# Altium PCB PCB3.PcbDoc (part 2 of 2)
Units mil, origin at the board's own origin, x right, y up, seen from the top; angles counter-clockwise.
Board outline 2814.98 x 1889.76 mil, 4 copper layers (Top Layer, GND, VCC, Bottom Layer), stack 23.756 mil thick; 125 components, 87 nets, 460 pads, 520 vias.
Unrouted connection lines stored in the file: 133.
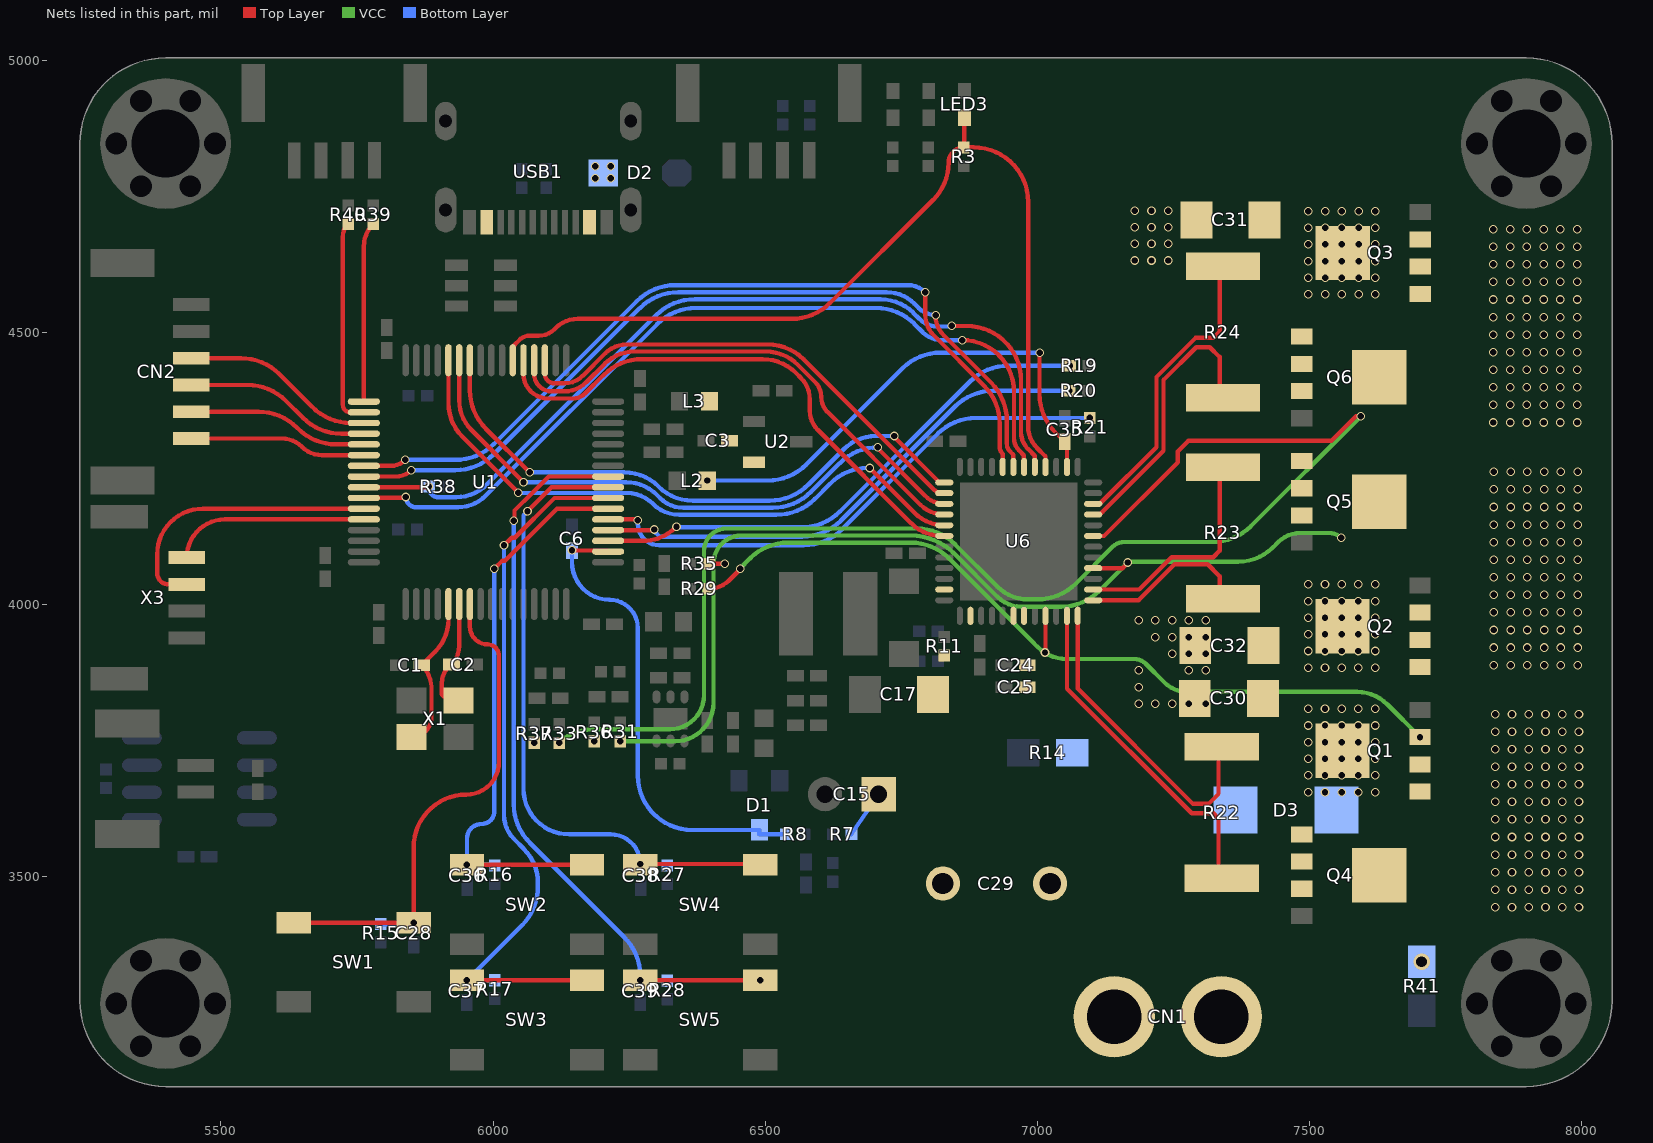
[diagram p3: the nets of this part, all layers, seen from the top]

## Via types
v1: diameter 15.75, hole 11.81, Top Layer to Bottom Layer, tented both sides, 515 vias
v2: diameter 30, hole 20, Top Layer to Bottom Layer, tented both sides, 5 vias

## Nets (pads, with @x,y where several pads share a name; then routed paths per layer and width w, separated by ;. In a path a pad name is that pad's centre, name@x,y a point inside that pad or via, vN(x,y) a via of type N, cw(c..) or ccw(c..) an arc to the next point about the centre after c; other vN are vias at no path point) (continued)
nFAULT: LED3.1 R3.1 U1.38 U6.28 | length 1747.3
  Top Layer w8: U1.38@6036.21,4448.95 6036.21,4473.6 6040.99,4478.38 6040.99,4478.74 6048.62,4486.37 cw(c6067.04,4467.95) 6067.04,4494 6084.02,4494 ccw(c6084.02,4534.68) 6112.78,4505.91 6115.14,4508.27 cw(c6155.53,4467.88) 6155.53,4525 6548.58,4525 ccw(c6548.58,4625) 6619.29,4554.29 6808.69,4743.69 ccw(c6740.33,4812.04) 6837,4812.04 cw(c6865,4812.04) R3.1@6865,4840.04 ; LED3.1@6866,4894.47 6866,4841.04 R3.1@6865,4840.04 ; U6.28@7015.01,4253.07 7015.01,4272.38 6999,4288.38 cw(c7037.64,4327.02) 6983,4327.02 6983,4740.04 ccw(c6883,4740.04) 6883,4840.04 R3.1@6865,4840.04
NRST: C28.2 R15.1 SW1.2 SW1.3 U1.7 | length 990.5
  Top Layer w8: SW1.3@5633.63,3415.83 v1(5854.1,3415.83) 5854.1,3554.1 cw(c5951,3554.1) 5951,3651 ccw(c5951,3711) 6011,3711 6011,3906 ccw(c5990.01,3906) 5990.01,3926.99 cw(c5990.01,3959.53) 5957.47,3959.53 U1.7@5957.47,4001.05
  Bottom Layer w8: R15.1@5794,3413.04 5854.1,3413.04 C28.2@5854.1,3417.61
PA4: C6.1 D1.3 R8.1 U1.18 | length 886.9
  Top Layer w8: v1(6145,4099.54) 6209.39,4099.54 U1.18@6211.41,4097.52
  Bottom Layer w8: v1(6145,4099.54) 6145,4078 ccw(c6214.07,4078) 6214.07,4008.93 cw(c6214.07,3957) 6266,3957 6266,3686.04 ccw(c6366,3686.04) 6366,3586.04 D1.3@6489.32,3586.04 6489.32,3578 R8.1@6537.92,3578
PB0: C38.2 R27.1 SW4.2 SW4.3 U1.24 | length 1246.4
  Top Layer w8: v1(6063.36,4171.64) 6107.35,4215.62 U1.24@6211.41,4215.62 ; v1(6270.57,3523.44) 6489.39,3523.44 SW4.2@6491,3521.83
  Bottom Layer w8: v1(6063.36,4171.64) 6055.9,4164.18 6055.9,3661.87 ccw(c6139.77,3661.87) 6139.77,3578 6216.01,3578 cw(c6216.01,3523.44) v1(6270.57,3523.44) 6312.6,3523.44 R27.1@6320,3516.04
PB1: C39.2 R28.1 SW5.2 SW5.3 U1.25 | length 1425.6
  Top Layer w8: v1(6038.03,4154) 6039.51,4155.48 6039.51,4173.06 6055.96,4189.51 6056.51,4189.51 6102.31,4235.31 U1.25@6211.41,4235.31 ; v1(6270.53,3309.83) v1(6491,3309.83)
  Bottom Layer w8: v1(6038.03,4154) 6038.03,3633.4 ccw(c6138.03,3633.4) 6067.32,3562.68 6241.24,3388.76 cw(c6170.53,3318.05) 6270.53,3318.05 v1(6270.53,3309.83) 6318.21,3309.83 R28.1@6324,3304.04
PC4: C36.2 R16.1 SW2.2 SW2.3 U1.22 | length 1090.7
  Top Layer w8: v1(5952.08,3521.83) SW2.2@6172.55,3521.83 ; v1(6002.28,4066) 6016.66,4080.38 6021.66,4080.38 6117.53,4176.26 U1.22@6211.41,4176.26
  Bottom Layer w8: v1(5952.08,3521.83) 5999.21,3521.83 R16.1@6003,3518.04 ; C36.2@5952.08,3531.68 5952.08,3570.08 cw(c5979,3570.08) 5979,3597 ccw(c5979,3620.28) 6002.28,3620.28 v1(6002.28,4066)
PC5: C37.2 R17.1 SW3.2 SW3.3 U1.23 | length 1370.6
  Top Layer w8: v1(5952.08,3309.83) SW3.2@6172.55,3309.83 ; v1(6020.15,4109) 6020.34,4109 6034.3,4122.96 6039.96,4122.96 6112.94,4195.94 U1.23@6211.41,4195.94
  Bottom Layer w8: R17.1@6004,3303.04 5997.21,3309.83 v1(5952.08,3309.83) 6053.14,3410.89 ccw(c5982.43,3481.61) 6082.43,3481.61 6082.43,3489 ccw(c5994.14,3489) 6056.57,3551.43 6038.43,3569.57 cw(c6082.54,3613.69) 6020.15,3613.69 v1(6020.15,4109)
PWM_AH: U1.42 U6.37 | length 1101.7
  Top Layer w8: U1.42@5957.47,4448.95 5957.47,4393.95 ccw(c6057.47,4393.95) 5986.76,4323.24 6066.89,4243.11 v1(6067.34,4243.56) ; v1(6736.78,4309.78) 6736,4309 6820.46,4224.54 U6.37@6829,4224.54
  Bottom Layer w8: v1(6067.34,4243.56) 6067.34,4243 6241.23,4243 cw(c6241.23,4154.23) 6304,4217 ccw(c6366.77,4279.77) 6366.77,4191 6508.28,4191 ccw(c6508.28,4291) 6578.99,4220.29 6643.34,4284.65 cw(c6704.02,4223.97) 6704.02,4309.78 v1(6736.78,4309.78)
PWM_AL: U1.35 U6.38 | length 902.9
  Top Layer w8: U1.35@6095.27,4448.95 6095.27,4423.92 ccw(c6112.67,4423.92) 6112.67,4406.53 6131.53,4406.53 ccw(c6131.53,4453.44) 6164.7,4420.27 6205.83,4461.4 cw(c6245.91,4421.33) 6245.91,4478 6504.5,4478 cw(c6504.5,4384.39) 6570.7,4450.58 6811.25,4210.03 6811.78,4210.03 6816.96,4204.85 U6.38@6829,4204.85
PWM_BH: U1.43 U6.39 | length 1135.6
  Top Layer w8: U1.43@5937.79,4448.95 5937.79,4375.59 ccw(c6015.97,4375.59) 5960.69,4320.31 v1(6056,4225) ; v1(6707,4289) 6707,4286.72 6794.1,4199.62 ccw(c6829,4234.52) U6.39@6829,4185.17
  Bottom Layer w8: v1(6056,4225) 6244.38,4225 cw(c6244.38,4144.77) 6301.12,4201.5 6306.92,4195.7 ccw(c6349.64,4238.42) 6349.64,4178 6513.66,4178 ccw(c6513.66,4278) 6584.37,4207.29 6637.15,4260.07 cw(c6707,4190.21) v1(6707,4289)
PWM_BL: U1.36 U6.40 | length 954.5
  Top Layer w8: U1.36@6075.58,4448.94 6075.58,4423.93 ccw(c6107.71,4423.93) 6107.71,4391.8 6131.17,4391.8 ccw(c6131.17,4448.42) 6171.2,4408.39 6205.07,4442.26 cw(c6259.98,4387.35) 6259.98,4465 6500.67,4465 cw(c6500.67,4380.64) 6560.32,4440.29 6591.54,4409.07 cw(c6564.08,4381.61) 6602.92,4381.61 ccw(c6641.75,4381.61) 6614.29,4354.16 6784.56,4183.88 ccw(c6829,4228.32) U6.40@6829,4165.48
PWM_CH: U1.44 U6.41 | length 1153.6
  Top Layer w8: U1.44@5918.1,4448.95 5918.1,4370.75 ccw(c6007.06,4370.75) 5944.16,4307.84 v1(6046.66,4205.34) ; v1(6692,4251) 6774.72,4168.28 ccw(c6829,4222.56) U6.41@6829,4145.8
  Bottom Layer w8: v1(6046.66,4205.34) 6047,4205 6245.72,4205 cw(c6245.72,4136.72) 6294,4185 ccw(c6342.28,4233.28) 6342.28,4165 6520.58,4165 ccw(c6520.58,4265) 6591.29,4194.29 6619.64,4222.64 cw(c6688.1,4154.19) 6688.1,4251 v1(6692,4251)
PWM_CL: U1.37 U6.42 | length 1008.8
  Top Layer w8: U1.37@6055.9,4448.95 6055.9,4423.92 ccw(c6101.02,4423.92) 6101.02,4378.8 6146.71,4378.8 ccw(c6146.71,4410.9) 6169.41,4388.2 6202.91,4421.71 cw(c6273.62,4351) 6273.62,4451 6495.33,4451 cw(c6495.33,4364.33) 6556.62,4425.62 6565.49,4416.74 cw(c6525.64,4376.88) 6582,4376.88 6582,4356.3 ccw(c6631.69,4356.3) 6596.55,4321.17 6768.42,4149.3 ccw(c6824.41,4205.29) 6824.41,4126.11 U6.42@6829,4126.11
SHA: Q1.1 Q1.2 Q1.3 Q4.5 R29.2 U6.9 | length 1537.4
  Top Layer w8: R29.2@6396.25,4029.33 ccw(c6396.25,4082.63) 6433.94,4044.94 6454,4065 v1(6454,4066) ; v1(7014,3912) 7015.01,3913.01 U6.9@7015.01,3979.47
  VCC w8: v1(6454,4066) 6454,4067 6471.61,4084.61 cw(c6542.32,4013.9) 6542.32,4113.9 6767.43,4113.9 cw(c6767.43,4013.9) 6838.14,4084.61 6871.68,4051.07 ; 6871.56,4051.18 6988.64,3934.11 ; 6988.75,3934 7000.38,3922.37 ccw(c7054.38,3976.36) 7054.38,3900 7178.21,3900 cw(c7178.21,3870.25) 7199.25,3891.29 7233.63,3856.9 ccw(c7275.25,3898.51) 7275.25,3839.66 7587.75,3839.66 cw(c7587.75,3762.11) 7642.59,3816.95 v1(7702.94,3756.6)
  other v1: 7841.25,3444 7872,3444 7902.75,3444 7933.5,3444 7964.25,3444 7995,3444 7841.25,3476.27 7872,3476.27 7902.75,3476.27 7933.5,3476.27 7964.25,3476.27 7995,3476.27 7841.25,3508.55 7872,3508.55 7902.75,3508.55 7933.5,3508.55 7964.25,3508.55 7995,3508.55 7841.25,3540.82 7872,3540.82 7902.75,3540.82 7933.5,3540.82 7964.25,3540.82 7995,3540.82 7841.25,3573.09 7872,3573.09 7902.75,3573.09 7933.5,3573.09 7964.25,3573.09 7995,3573.09 7841.25,3605.36 7872,3605.36 7902.75,3605.36 7933.5,3605.36 7964.25,3605.36 7995,3605.36 7841.25,3637.64 7872,3637.64 7902.75,3637.64 7933.5,3637.64 7964.25,3637.64 7995,3637.64 7841.25,3669.91 7872,3669.91 7902.75,3669.91 7933.5,3669.91 7964.25,3669.91 7995,3669.91 7841.25,3702.18 7872,3702.18 7902.75,3702.18 7933.5,3702.18 7964.25,3702.18 7995,3702.18 7841.25,3734.45 7872,3734.45 7902.75,3734.45 7933.5,3734.45 7964.25,3734.45 7995,3734.45 7841.25,3766.73 7872,3766.73 7902.75,3766.73 7933.5,3766.73 7964.25,3766.73 7995,3766.73 7841.25,3799 7872,3799 7902.75,3799 7933.5,3799 7964.25,3799 7995,3799
SHB: Q2.1 Q2.2 Q2.3 Q5.5 R31.2 U6.16 | length 1813.6
  Top Layer w8: U6.16@7102.6,4067.06 7157.06,4067.06 7166.7,4076.7 v1(7165.96,4077.44)
  VCC w8: v1(6233.53,3749.05) 6334.54,3749.05 ccw(c6334.54,3819.51) 6405,3819.51 6405,4075.33 cw(c6456.57,4075.33) 6456.57,4126.9 6767.43,4126.9 cw(c6767.43,4013.9) 6847.37,4093.76 6848.23,4092.91 6926.86,4014.27 ccw(c6970.49,4057.91) 6970.49,3996.2 7043.29,3996.2 ccw(c7043.29,4096.2) 7114.01,4025.49 7167.22,4078.7 7368.85,4078.7 ccw(c7368.85,4169.13) 7432.8,4105.19 7442.14,4114.53 cw(c7483.53,4073.14) 7483.53,4131.67 7535.91,4131.67 cw(c7535.91,4100.43) v1(7558,4122.52)
  other v1: 7838.75,3888.91 7869.5,3888.91 7900.25,3888.91 7931,3888.91 7961.75,3888.91 7992.5,3888.91 7838.75,3921.18 7869.5,3921.18 7900.25,3921.18 7931,3921.18 7961.75,3921.18 7992.5,3921.18 7838.75,3953.45 7869.5,3953.45 7900.25,3953.45 7931,3953.45 7961.75,3953.45 7992.5,3953.45 7838.75,3985.73 7869.5,3985.73 7900.25,3985.73 7931,3985.73 7961.75,3985.73 7992.5,3985.73 7838.75,4018 7869.5,4018 7900.25,4018 7931,4018 7961.75,4018 7992.5,4018 7838.75,4050.27 7869.5,4050.27 7900.25,4050.27 7931,4050.27 7961.75,4050.27 7992.5,4050.27 7838.75,4082.55 7869.5,4082.55 7900.25,4082.55 7931,4082.55 7961.75,4082.55 7992.5,4082.55 7838.75,4114.82 7869.5,4114.82 7900.25,4114.82 7931,4114.82 7961.75,4114.82 7992.5,4114.82 7838.75,4147.09 7869.5,4147.09 7900.25,4147.09 7931,4147.09 7961.75,4147.09 7992.5,4147.09 7838.75,4179.36 7869.5,4179.36 7900.25,4179.36 7931,4179.36 7961.75,4179.36 7992.5,4179.36 7838.75,4211.64 7869.5,4211.64 7900.25,4211.64 7931,4211.64 7961.75,4211.64 7992.5,4211.64 7838.75,4243.91 7869.5,4243.91 7900.25,4243.91 7931,4243.91 7961.75,4243.91 7992.5,4243.91
SHC: Q3.1 Q3.2 Q3.3 Q6.5 R33.2 U6.19 | length 2572.8
  Top Layer w8: U6.19@7102.6,4126.11 7122.52,4126.11 7257.77,4261.35 7257.77,4281.35 7277.42,4301 7540.27,4301 7585.27,4346 v1(7594,4346)
  VCC w8: v1(6122,3746.12) cw(c6182.07,3686.04) 6182.07,3771 6325.06,3771 ccw(c6325.06,3833.5) 6387.56,3833.5 6387.56,4098.6 cw(c6428.86,4098.6) 6428.86,4139.9 6778.2,4139.9 cw(c6778.2,4039.9) 6848.91,4110.61 6926.41,4033.11 ccw(c6983.1,4089.8) 6983.1,4009.63 7000.21,4009.63 ccw(c7000.21,4109.63) 7070.92,4038.92 7138.16,4106.16 cw(c7159.5,4084.82) 7159.5,4115 7321.58,4115 ccw(c7321.58,4215) 7392.29,4144.29 v1(7594,4346)
  other v1: 7837.75,4334.64 7868.5,4334.64 7899.25,4334.64 7930,4334.64 7960.75,4334.64 7991.5,4334.64 7837.75,4366.91 7868.5,4366.91 7899.25,4366.91 7930,4366.91 7960.75,4366.91 7991.5,4366.91 7837.75,4399.18 7868.5,4399.18 7899.25,4399.18 7930,4399.18 7960.75,4399.18 7991.5,4399.18 7837.75,4431.45 7868.5,4431.45 7899.25,4431.45 7930,4431.45 7960.75,4431.45 7991.5,4431.45 7837.75,4463.73 7868.5,4463.73 7899.25,4463.73 7930,4463.73 7960.75,4463.73 7991.5,4463.73 7837.75,4496 7868.5,4496 7899.25,4496 7930,4496 7960.75,4496 7991.5,4496 7837.75,4528.27 7868.5,4528.27 7899.25,4528.27 7930,4528.27 7960.75,4528.27 7991.5,4528.27 7837.75,4560.55 7868.5,4560.55 7899.25,4560.55 7930,4560.55 7960.75,4560.55 7991.5,4560.55 7837.75,4592.82 7868.5,4592.82 7899.25,4592.82 7930,4592.82 7960.75,4592.82 7991.5,4592.82 7837.75,4625.09 7868.5,4625.09 7899.25,4625.09 7930,4625.09 7960.75,4625.09 7991.5,4625.09 7837.75,4657.36 7868.5,4657.36 7899.25,4657.36 7930,4657.36 7960.75,4657.36 7991.5,4657.36 7837.75,4689.64 7868.5,4689.64 7899.25,4689.64 7930,4689.64 7960.75,4689.64 7991.5,4689.64
SNA: C29.2 C30.1 C31.1 C32.1 CN1.2 D3.2 R14.1 R22.1 R23.1 R24.1 R35.1 R36.1 R37.1 R41.1 U6.2 U6.12 U6.13 U6.22 | length 1472.2
  Top Layer w8: R35.1@6396.25,4075.33 6425.67,4075.33 v1(6426,4075) ; U6.12@7074.07,3979.47 7074.07,3845.93 7286.03,3633.97 7314.45,3633.97 7332.8,3652.32 R22.1@7332.8,3738.65 ; U6.13@7102.6,4008 7186,4008 7252,4074 7313,4074 7334.8,4052.2 R23.1@7334.8,4010.93 ; U6.22@7102.6,4185.17 7114.66,4185.17 7218.77,4289.27 7218.77,4418.21 7290.55,4490 7323,4490 7334.8,4501.8 R24.1@7334.8,4621.37
  other v1: 6076.09,3746.16 6186.16,3748.96 7186,3818 7216.75,3818 7247.5,3818 7278.25,3818 7309,3818 7186,3848.6 7186,3879.2 7278.25,3879.2 7309,3879.2 7247.5,3909.8 7278.25,3909.8 7309,3909.8 7216.75,3940.4 7247.5,3940.4 7278.25,3940.4 7309,3940.4 7186,3971 7216.75,3971 7247.5,3971 7278.25,3971 7309,3971 7179,4632.2 7209.75,4632.2 7240.5,4632.2 7179,4662.8 7209.75,4662.8 7240.5,4662.8 7179,4693.4 7209.75,4693.4 7240.5,4693.4 7179,4724 7209.75,4724 7240.5,4724
  other v2: 7706,3344
SOA: R21.1 U1.21 | length 1002.6
  Top Layer w8: U1.21@6211.41,4156.56 6264.44,4156.56 v1(6266,4155)
  Bottom Layer w8: v1(6266,4155) 6266,4148.59 ccw(c6305.59,4148.59) 6305.59,4109 6570.63,4109 ccw(c6570.63,4209) 6641.34,4138.29 6816.76,4313.71 cw(c6887.47,4243) 6887.47,4343 v1(7096,4343)
SOB: R20.1 U1.20 | length 957.7
  Top Layer w8: U1.20@6211.41,4136.88 6294.88,4136.88 v1(6296,4138)
  Bottom Layer w8: v1(6296,4138) 6296,4134.63 6305.63,4125 6568.24,4125 ccw(c6568.24,4225) 6638.95,4154.29 6848.18,4363.52 cw(c6918.89,4292.81) 6918.89,4392.81 v1(7058.92,4392.81)
SOC: R19.1 U1.19 | length 970.1
  Top Layer w8: U1.19@6211.41,4117.19 6275.01,4117.19 ccw(c6275.01,4204.87) 6297.84,4120.22 ccw(c6296,4138) 6304.65,4122.36 ccw(c6275.01,4204.87) v1(6337,4142.87)
  Bottom Layer w8: v1(6337,4142.87) 6337.87,4142 6566.86,4142 ccw(c6566.86,4242) 6637.57,4171.29 6875.8,4409.52 cw(c6946.51,4338.81) 6946.51,4438.81 v1(7059.92,4438.81)
SPA: Q4.1 Q4.2 Q4.3 R22.2 U6.11 | length 621.1
  Top Layer w8: U6.11@7054.38,3979.47 7054.38,3845.62 7283.43,3616.57 7323.55,3616.57 7332.8,3607.33 R22.2@7332.8,3497.21
SPB: Q5.1 Q5.2 Q5.3 R23.2 U6.14 | length 415.2
  Top Layer w8: U6.14@7102.6,4027.69 7187.3,4027.69 7246.62,4087 7323,4087 7334.8,4098.8 R23.2@7334.8,4252.37
SPC: Q6.1 Q6.2 Q6.3 R24.2 U6.21 | length 518.4
  Top Layer w8: U6.21@7102.6,4165.48 7114.64,4165.48 7119.82,4170.66 ; 7119.83,4170.66 7231.77,4282.59 7231.77,4292.12 7231.77,4412.83 7291.94,4473 7316.87,4473 7334.8,4455.07 R24.2@7334.8,4379.93
SPI1_CS: U1.55 U6.32 | length 1534.6
  Top Layer w8: U1.55@5762.59,4254.99 5812.43,4254.99 ccw(c5812.43,4292.57) v1(5839,4266) ; v1(6794,4574) 6794,4533 ccw(c6848.71,4533) 6810.02,4494.31 6901.71,4402.63 cw(c6831,4331.92) 6931,4331.92 6931,4289.37 ccw(c6948.99,4289.37) 6936.27,4276.65 U6.32@6936.27,4253.07
  Bottom Layer w8: v1(5839,4266) 5931.19,4266 ccw(c5931.19,4366) 6001.9,4295.29 6264.33,4557.71 cw(c6335.04,4487) 6335.04,4587 6762.62,4587 cw(c6762.62,4542.62) v1(6794,4574)
SPI1_MISO: R38.1 U1.57 U6.29 | length 1601.1
  Top Layer w8: U1.57@5762.59,4215.62 v1@5880.62,4215.62 ; v1(6842.96,4511.96) 6870,4511.96 cw(c6870,4411.96) 6970,4411.96 6970,4316.91 ccw(c7013.24,4316.91) 6982.66,4286.34 6995.33,4273.67 U6.29@6995.33,4253.07
  Bottom Layer w8: v1(5882,4217) 5882,4214.61 ccw(c5899.24,4214.61) 5899.24,4197.37 5932.26,4197.37 ccw(c5932.26,4277.09) 5988.62,4220.72 6299.62,4531.71 cw(c6370.33,4461) 6370.33,4561 6711.75,4561 cw(c6711.75,4475.64) 6772.11,4536 6783.1,4525 ccw(c6816.91,4558.81) 6816.91,4511 6842,4511 v1(6842.96,4511.96)
SPI1_MOSI: U1.58 U6.30 | length 1566.8
  Top Layer w8: U1.58@5762.59,4195.94 5763.32,4196.66 5838.66,4196.66 5839.88,4197.88 v1(5840,4197.75) ; v1(6862,4486) cw(c6862,4391) 6957,4391 6957,4305.46 ccw(c6987.83,4305.46) 6966.03,4283.66 6975.06,4274.63 6975.06,4253.65 U6.30@6975.64,4253.07
  Bottom Layer w8: v1(5840,4197.75) ccw(c5858.75,4197.75) 5858.75,4179 5935.72,4179 ccw(c5935.72,4250.39) 5986.2,4199.91 6302,4515.71 cw(c6372.71,4445) 6372.71,4545 6703.3,4545 cw(c6703.3,4445) 6774.01,4515.71 6789.3,4500.42 ccw(c6824.11,4535.23) 6824.11,4486 v1(6862,4486)
SPI1_SCK: U1.56 U6.31 | length 1523.6
  Top Layer w8: U1.56@5762.59,4235.3 5821.77,4235.3 ccw(c5821.77,4275.23) v1(5850,4247) ; v1(6813,4532) 6813,4530.34 ccw(c6862.78,4530.34) 6827.58,4495.14 6914.71,4408.01 cw(c6844,4337.3) 6944,4337.3 6944,4295.76 ccw(c6964.41,4295.76) 6949.98,4281.33 6955.96,4275.35 U6.31@6955.96,4253.07
  Bottom Layer w8: v1(5850,4247) 5930.58,4247 ccw(c5930.58,4347) 6001.29,4276.29 6269.71,4544.71 cw(c6340.42,4474) 6340.42,4574 6723.3,4574 cw(c6723.3,4502.3) 6774,4553 6782.27,4544.73 ccw(c6813,4575.46) v1(6813,4532)
SPI3_CS: CN2.4 U1.51 | length 358
  Top Layer w8: CN2.4@5445.22,4452.72 5536.86,4452.72 cw(c5536.86,4352.72) 5607.57,4423.43 5667.98,4363.02 ccw(c5738.69,4433.73) 5738.69,4333.73 U1.51@5762.59,4333.73
SPI3_MISO: CN2.2 U1.53 | length 333.6
  Top Layer w8: CN2.2@5445.22,4354.32 5569.26,4354.32 cw(c5569.26,4254.32) 5639.97,4325.03 5641.35,4323.65 ccw(c5712.06,4394.36) 5712.06,4294.36 U1.53@5762.59,4294.36
SPI3_MOSI: CN2.1 U1.54 | length 310.9
  Top Layer w8: CN2.1@5445.22,4305.12 5612,4305.12 cw(c5612,4253.15) 5648.75,4289.9 ccw(c5685.5,4326.64) 5685.5,4274.68 U1.54@5747.95,4274.68
SPI3_SCK: CN2.3 U1.52 | length 345.8
  Top Layer w8: CN2.3@5445.22,4403.52 5549.06,4403.52 cw(c5549.06,4303.52) 5619.77,4374.23 5650.67,4343.33 ccw(c5721.38,4414.05) 5721.38,4314.05 U1.52@5762.59,4314.05
SWCLK: R40.2 U1.50 | length 355.9
  Top Layer w8: R40.2@5733.63,4699.05 ccw(c5756.73,4675.96) 5724.06,4675.96 5724.06,4366.93 ccw(c5737.58,4366.93) U1.50@5737.58,4353.42
SWDIO: R39.2 U1.49 | length 330.5
  Top Layer w8: U1.49@5762.59,4373.1 5762.59,4657.92 cw(c5820.77,4657.92) R39.2@5779.63,4699.05
USART1_RX: U1.60 X3.4 | length 365.3
  Top Layer w8: X3.4@5437.35,4086.45 cw(c5507.46,4086.45) 5507.46,4156.56 U1.60@5762.59,4156.56
USART1_TX: U1.59 X3.3 | length 528
  Top Layer w8: X3.3@5437.34,4037.24 5403.88,4037.24 cw(c5403.88,4058.12) 5383,4058.12 5383,4092.39 cw(c5466.87,4092.39) 5466.87,4176.26 U1.59@5762.59,4176.26
VBUS1: D2.1 USB1.A4B9 USB1.B4A9
  other v1: 6188,4783 6216,4783 6188,4805 6216,4805
VIN: C15.1 C17.1 C24.1 C25.2 C29.1 C30.2 C31.2 C32.2 CN1.1 D3.1 Q1.5 Q2.5 Q3.5 R7.2 R11.2 U6.6 U6.7 U6.47 | length 89
  Bottom Layer w8: R7.2@6658.36,3578 C15.1@6708.35,3651.68
  other v1: 7497.64,3655.6 7528.39,3655.6 7559.14,3655.6 7589.89,3655.6 7620.64,3655.6 7497.64,3686.2 7528.39,3686.2 7559.14,3686.2 7589.89,3686.2 7620.64,3686.2 7497.64,3716.8 7528.39,3716.8 7559.14,3716.8 7589.89,3716.8 7620.64,3716.8 7497.64,3747.4 7528.39,3747.4 7559.14,3747.4 7589.89,3747.4 7620.64,3747.4 7497.64,3778 7528.39,3778 7559.14,3778 7589.89,3778 7620.64,3778 7497.64,3808.6 7528.39,3808.6 7559.14,3808.6 7589.89,3808.6 7620.64,3808.6 7497.64,3884.2 7528.39,3884.2 7559.14,3884.2 7589.89,3884.2 7620.64,3884.2 7497.64,3914.8 7528.39,3914.8 7559.14,3914.8 7589.89,3914.8 7620.64,3914.8 7497.64,3945.4 7528.39,3945.4 7559.14,3945.4 7589.89,3945.4 7620.64,3945.4 7497.64,3976 7528.39,3976 7559.14,3976 7589.89,3976 7620.64,3976 7497.64,4006.6 7528.39,4006.6 7559.14,4006.6 7589.89,4006.6 7620.64,4006.6 7497.64,4037.2 7528.39,4037.2 7559.14,4037.2 7589.89,4037.2 7620.64,4037.2 7498,4570 7528.75,4570 7559.5,4570 7590.25,4570 7621,4570 7498,4600.6 7528.75,4600.6 7559.5,4600.6 7590.25,4600.6 7621,4600.6 7498,4631.2 7528.75,4631.2 7559.5,4631.2 7590.25,4631.2 7621,4631.2 7498,4661.8 7528.75,4661.8 7559.5,4661.8 7590.25,4661.8 7621,4661.8 7498,4692.4 7528.75,4692.4 7559.5,4692.4 7590.25,4692.4 7621,4692.4 7498,4723 7528.75,4723 7559.5,4723 7590.25,4723 7621,4723
VREF: C3.1 C35.1 L2.1 L3.1 U2.2 U6.26 | length 927
  Top Layer w8: v1(7004,4463) 7004,4386.96 ccw(c7104,4386.96) 7033.29,4316.25 C35.1@7050,4299.54 ; C35.1@7052.34,4301.88 7054.38,4299.85 U6.26@7054.38,4253.07
  Bottom Layer w8: v1(6393.56,4228) 6504.58,4228 ccw(c6504.58,4328) 6575.29,4257.29 6751.71,4433.71 cw(c6822.42,4363) 6822.42,4463 v1(7004,4463)
XTAL_N: C2.1 U1.6 X1.1 | length 211.1
  Top Layer w8: X1.1@5936.93,3823.68 5917.43,3823.68 5905.91,3835.21 5905.91,3856.3 cw(c5944.69,3856.3) 5917.27,3883.73 C2.1@5923.54,3890 ccw(c5889.14,3924.4) 5937.79,3924.4 U1.6@5937.79,4001.05
XTAL_P: C1.2 U1.5 X1.3 | length 286.7
  Top Layer w8: X1.3@5850.31,3756.76 ccw(c5850.31,3793.31) 5886.87,3793.31 5886.87,3847.31 ccw(c5877.87,3847.31) 5886.82,3848.21 ccw(c5825.86,3845.86) C1.2@5869,3889 5893.55,3913.55 ccw(c5834.28,3972.82) 5918.1,3972.82 U1.5@5918.1,4001.05
pads on no net: U1.2 U1.3 U1.4 U1.10 U1.11 U1.26 U1.30 U1.39 U5.3 U6.46 USB1.A8 USB1.B8

## Polygon pours and split planes (outlines as drawn)
VIN on Top Layer "NONET_L-01_P-001" (solid, remove dead copper, pour order 20): 6828.99,4040.2 6813.19,4040.2 ccw(c6813.18,4016.01) 6788.99,4016 6788.99,3884 cw(c6781.28,3883.99) 6781.27,3876.28 6779.25,3876.28 6779.25,3731.04 cw(c6734.21,3731.04) 6734.21,3686 6679.68,3686 ccw(c6679.68,3683.16) 6676.84,3683.16 6676.84,3418.1 ccw(c6759.94,3418.1) 6759.94,3335 7161.99,3335 cw(c7161.99,3249) 7247.99,3249 7247.99,3163.39 7421.5,3163.39 7421.5,3309.49 ccw(c7295.99,3309.49) 7295.99,3435 7271.99,3435 cw(c7271.98,3586) 7120.99,3586 7120.99,3737.17 ccw(c7042.17,3737.18) 7042.16,3816 7037.39,3816 cw(c7037.39,3847.39) 7006,3847.39 7006,3901.99 ccw(c6992.36,3901.99) 6992.36,3915.63 6990.36,3915.63 cw(c6990.36,3924.85) 6981.14,3924.85 6981.14,3997.69 6950.43,3997.69 6950.43,3923.55 ccw(c6958.36,3923.55) 6958.36,3915.63 6959.36,3915.63 cw(c6959.36,3909.1) 6965.89,3909.09 6965.89,3476.82 cw(c6923.08,3476.82) 6923.08,3434 6819.83,3434 cw(c6819.83,3480.84) 6772.99,3480.84 6772.99,3559.64 cw(c6811.35,3559.64) 6811.35,3598 6819.39,3598 ccw(c6819.39,3618.03) 6839.42,3618.03 6839.42,3923.55 6813.45,3923.55 cw(c6813.45,3931.01) 6805.99,3931.01 6805.99,4015 cw(c6820.16,4015) 6820.16,4029.18 6828.99,4029.18
GND on Top Layer "NONET_L-01_P-001" (solid, remove dead copper, pour order 28): 5537.83,5000.15 5537.83,4782.85 cw(c5415.5,4782.84) 5415.5,4660.51 5271.45,4660.51 ccw(c5271.45,4638.04) 5248.99,4638.04 5248.99,3526.01 ccw(c5350,3526.01) 5350,3425 5417.43,3425 cw(c5417.43,3302.45) 5539.99,3302.45 5539.99,3195 ccw(c5591.38,3195) 5591.38,3143.61 6617.09,3143.61 ccw(c6617.09,3193.5) 6666.99,3193.5 6666.99,3677.99 cw(c6683,3677.99) 6683,3694 6726.09,3694 ccw(c6726.09,3732.93) 6765.01,3732.93 6765.01,3892.71 6782.91,3892.71 6782.91,3939.96 6712.32,3939.96 6712.32,3876.28 6638.18,3876.28 6638.18,3939.96 7076.99,3939.96 7076.99,4909 ccw(c6985.98,4909) 6985.98,5000.01
SHA on Top Layer "NONET_L-01_P-001" (solid, remove dead copper, pour order 11): 7683.25,3773 7683.25,3613 7548.27,3613 7548.27,3394 8014.85,3394 8014.85,3818 7818,3818 7818,3773
SNA on Top Layer "NONET_L-01_P-001" (solid, remove dead copper, pour order 6): 7272.77,4036.18 7272.77,3987 7163,3987 7163,3800 7226,3800 7226,3715.37 7404.86,3715.37 7404.86,3763.9 7352.72,3763.9 7352.72,3985.69 7408.83,3985.69 7408.83,4036.18
3.3V on Top Layer "NONET_L-01_P-001" (solid, remove dead copper, pour order 24): 6329,3986.34 6329,3855.94 6344.42,3855.94 6344.42,3825.71 6371.37,3825.71 6371.37,3986.34
5V on Top Layer "NONET_L-01_P-001" (solid, remove dead copper, pour order 15): 6525.24,4060.04 6525.24,3765 6340,3765 6340,3718.26 6331.42,3718.26 6331.42,3693 6404.14,3693 6404.14,3719.32 6570.89,3719.32 6570.89,3906.5 6588.23,3906.5 6588.23,4060.04
VIN on Top Layer "NONET_L-01_P-001" (solid, remove dead copper, pour order 23): 7388.26,4672.64 7462.18,4672.64 7462.18,4537.53 7640.52,4537.53 7640.52,4754.46 7388.26,4754.46
SNA on Top Layer "NONET_L-01_P-001" (solid, remove dead copper, pour order 22): 6871.71,3990.69 6871.71,3969.71 cw(c6857,3969.7) 6857,3955 6846,3955 6846,3606 cw(c6817,3606) 6817,3577 6810,3577 ccw(c6810,3546.5) 6779.49,3546.49 6779.49,3491.29 ccw(c6837.29,3491.29) 6837.29,3433.49 6908.49,3433.49 ccw(c6908.49,3484.41) 6959.41,3484.41 6959.41,3792.59 ccw(c6923.63,3792.59) 6923.63,3828.37 6914.63,3828.37 cw(c6914.63,3865.63) 6877.37,3865.63 6877.37,3947.37 cw(c6880.01,3947.37) 6880.01,3950.01 6881.01,3950.01 ccw(c6881.01,3952.37) 6883.37,3952.37 6883.37,3990.69
VBUS1 on Top Layer "NONET_L-01_P-001" (solid, remove dead copper, pour order 17): 5976.7,4679.66 6000.32,4679.66 6000.32,4730.98 cw(c6010.34,4730.98) 6010.34,4741 6013,4741 ccw(c6013,4752) 6024,4752 6024,4811.08 cw(c6046.92,4811.08) 6046.92,4834 6103.34,4834 cw(c6103.34,4810.34) 6127,4810.34 6127,4760 ccw(c6144.27,4760) 6144.27,4742.73 6148.27,4742.73 cw(c6148.27,4725.32) 6165.68,4725.32 6165.68,4679.66 6189.3,4679.66 6189.3,4752.3 cw(c6205,4752.3) 6205,4768 6213,4768 ccw(c6213,4785) 6230,4785 6230,4844 ccw(c6188,4844) 6188,4886 6023,4886 ccw(c6023,4839.7) 5976.7,4839.7 5976.7,4726.82
VIN on Top Layer "NONET_L-01_P-001" (solid, remove dead copper, pour order 14): 7461.81,3958.67 7386.26,3958.67 7386.26,3791.84 7461.81,3791.84 7461.81,3623.14 7640.16,3623.14 7640.16,4071 7461.81,4071
SPC on Top Layer "NONET_L-01_P-001" (solid, remove dead copper, pour order 13): 7272.77,4405.18 7272.77,4354.69 7408.83,4354.69 7408.83,4377.64 7505.18,4377.64 7505.18,4507.16 7465.81,4507.16 7465.81,4405.18
SPB on Top Layer "NONET_L-01_P-001" (solid, remove dead copper, pour order 12): 7272.77,4277.62 7272.77,4227.13 7465.81,4227.13 7465.81,4149.04 7505.18,4149.04 7505.18,4278.56
SHC on Top Layer "NONET_L-01_P-001" (solid, remove dead copper, pour order 9): 7683.41,4688 7683.41,4526 7548.27,4526 7548.27,4309 8014.85,4309 8014.85,4699 7818,4699 7818,4688
SHB on Top Layer "NONET_L-01_P-001" (solid, remove dead copper, pour order 10): 7548.27,4298 7548.27,4081 7757,4081 7757,4001 7683.25,4001 7683.25,3858.49 8014.85,3858.49 8014.85,4298
SNA on Top Layer "NONET_L-01_P-001" (solid, remove dead copper, pour order 7): 7163,4749.67 7163,4596.13 7406.86,4596.13 7406.86,4646.62 7343,4646.62 7343,4749.67
VREF on Top Layer "NONET_L-01_P-001" (solid, remove dead copper, pour order 2): 6381.81,4391.01 6381.81,4356.81 6418.91,4356.81 6418.91,4245.01 6377.81,4245.01 6377.81,4212.07 6500.57,4212.07 6500.57,4277 6450.01,4277 6450.01,4391.01 6413.3,4391.01
SPA on Top Layer "NONET_L-01_P-001" (solid, remove dead copper, pour order 1): 7264.77,3522.46 7264.77,3450.89 7505.18,3450.89 7505.18,3580.42 7465.81,3580.42 7465.81,3522.46 7400.83,3522.46
NetC21_2 on Top Layer "NONET_L-01_P-001" (solid, remove dead copper, pour order 0): 6643.36,4104.9 6643.36,3906.5 6706.35,3906.5 6706.35,4019.57 6782.36,4019.57 6782.36,4061.55 6840.22,4061.55 6840.22,4072.57 6752.43,4072.57 6752.43,4104.9
SHA on Bottom Layer "NONET_L-01_P-001" (solid, remove dead copper, pour order 42): 7816,3815 7816,3421.3 8012.85,3421.3 8012.85,3815
SHB on Bottom Layer "NONET_L-01_P-001" (solid, remove dead copper, pour order 41): 7817,4263 7817,3869.3 8013.85,3869.3 8013.85,4263
SHC on Bottom Layer "NONET_L-01_P-001" (solid, remove dead copper, pour order 40): 7818.15,4699.85 7818.15,4306.15 8015,4306.15 8015,4699.85
GND on Bottom Layer "NONET_L-01_P-001" (solid, remove dead copper, pour order 27): 5553,4876.76 5553,4767 cw(c5462,4767) 5462,4676 5373,4676 ccw(c5373,4568) 5265,4568 5265,3525 ccw(c5374,3525) 5374,3416 5441,3416 cw(c5441,3312) 5545,3312 5545,3286 ccw(c5661,3286) 5661,3170 6622,3170 ccw(c6622,3298.65) 6750.65,3298.65 6750.65,3616.09 cw(c6827.1,3616.09) 6827.1,3692.54 6993.54,3692.54 ccw(c6993.54,3713) 7014,3713 7014,3769.46 cw(c7058.54,3769.46) 7058.54,3814 7080,3814 ccw(c7080,3872) 7138,3872 7138,4764.03 ccw(c6918.14,4764.04) 6918.08,4983.9 5653.24,4977.51 ccw(c5653.74,4876.76)
SNA on Bottom Layer "NONET_L-01_P-001" (solid, remove dead copper, pour order 5): 7126.01,3156.39 6946.61,3156.39 cw(c6946.61,3320) 6783,3320 6783,3585 cw(c6872,3585) 6872,3674 7001.47,3674 ccw(c7001.47,3693.53) 7021,3693.53 7021,3759.81 cw(c7061.19,3759.81) 7061.19,3800 7127.47,3800 ccw(c7127.47,3835.53) 7163,3835.53 7163,4724 cw(c7188.67,4724) 7188.67,4749.67 7362.33,4749.67 cw(c7362.33,4707.84) 7404.16,4707.84 7404.16,3584.16 cw(c7379,3584.16) 7379,3559 7004,3559 ccw(c7004,3509) 6954,3509 6954,3433 ccw(c7020,3433) 7020,3367 7128.94,3367 cw(c7128.94,3278.84) 7217.1,3277.94 7216.77,3246.23 cw(c7126.02,3247.15)
NetC5_1 on Bottom Layer "NONET_L-01_P-001" (solid, remove dead copper, pour order 19): 6560.86,3588.63 6560.86,3511.91 6635.41,3511.91 6635.41,3588.63
VIN on Bottom Layer "NONET_L-01_P-001" (solid, remove dead copper, pour order 4): 6974,3482.87 6974,3449 ccw(c7029,3449) 7029,3394 7125.66,3394 cw(c7125.66,3278.77) 7240.88,3278.77 7240.88,3235.47 ccw(c7319.96,3235.47) 7319.96,3156.39 7529.39,3156.39 ccw(c7529.39,3267.32) 7640.32,3267.32 7640.32,4702.68 ccw(c7593.33,4702.68) 7593.33,4749.67 7463.13,4749.67 ccw(c7463.13,4701.54) 7415,4701.54 7415,3587.12 cw(c7371.57,3587.12) 7371.57,3543.69 7264.77,3543.69 7034.82,3543.69 ccw(c7034.81,3482.88)
VIN on VCC "NONET_L-01_P-001" (solid, remove dead copper, pour order 39): 7465,4762 7465,4586.37 ccw(c7505.37,4586.37) 7505.37,4546 7621.92,4546 ccw(c7621.92,4574.08) 7650,4574.08 7650,4706 cw(c7681,4706) 7681,4737 7706.92,4737 cw(c7706.92,4721.3) 7722.62,4721.3 7722.62,4039.92 cw(c7703.13,4039.92) 7703.13,4020.44 7651.56,4020.44 cw(c7651.56,4031.84) 7640.16,4031.84 7640.16,4037.3 ccw(c7627.5,4037.3) 7627.49,4049.96 7507.96,4049.96 ccw(c7507.96,4003.82) 7461.81,4003.81 7461.81,3469.7 ccw(c7480.62,3469.7) 7480.62,3450.89 7485.07,3450.89 cw(c7485.07,3430.78) 7505.18,3430.78 7505.18,3399.18 cw(c7451.36,3399.18) 7451.36,3345.36 7314.36,3345.36 ccw(c7314.36,3279) 7248,3279 7248,3227.21 ccw(c7318.83,3227.21) 7318.83,3156.39 7614.39,3156.39 ccw(c7614.39,3297) 7755,3297 7755,3456 cw(c7788,3456) 7788,3489 7798,3489 ccw(c7798,3514) 7823,3514 7823,4683 ccw(c7811,4683) 7811,4695 7803,4695 cw(c7803,4710) 7788,4710 7788,4784 ccw(c7725,4784) 7725,4847 7550,4847 ccw(c7550,4762)
SNA on VCC "NONET_L-01_P-001" (solid, remove dead copper, pour order 34): 6416.39,4075.33 6416.39,3797.34 cw(c6351.19,3797.34) 6351.19,3732.14 6216.61,3732.14 cw(c6216.6,3742.96) 6205.79,3742.96 6205.79,3750.33 ccw(c6197.12,3750.33) 6197.12,3759 6177,3759 ccw(c6177,3749) 6167,3749 6167,3743.43 cw(c6155.71,3743.43) 6155.71,3732.14 6113.86,3732.14 cw(c6113.86,3743.63) 6102.37,3743.63 6102.37,3746.35 ccw(c6091.43,3746.35) 6091.42,3757.29 6075.29,3757.29 ccw(c6075.29,3747.99) 6065.99,3747.99 6065.99,3671.01 ccw(c6150,3671.01) 6150,3587 6285.57,3587 cw(c6285.57,3514.57) 6358,3514.57 6358,3455.98 ccw(c6463.98,3455.98) 6463.98,3350 6816,3350 ccw(c6816,3394) 6860,3394 6860,3498.71 ccw(c6837.6,3498.71) 6837.6,3521.12 6519.22,3521.12 cw(c6519.22,3605.34) 6435,3605.34 6435,4076.95 ccw(c6428.85,4076.96) 6428.94,4083.11 6424.35,4083.17 ccw(c6424.23,4075.34)
3.3V on VCC "NONET_L-01_P-001" (solid, remove dead copper, pour order 38): 5413,4522.33 5413,3553.29 ccw(c5439.92,3553.29) 5439.92,3526.37 5476.37,3526.37 ccw(c5476.37,3551) 5501,3551 5501,3676.99 cw(c5554.01,3676.99) 5554.01,3730 5686,3730 cw(c5686,3672.13) 5743.87,3672.13 5743.87,3388.32 ccw(c5881.41,3388.32) 5881.41,3250.78 6295.82,3250.78 ccw(c6295.82,3290.67) 6335.71,3290.67 6335.71,3514.52 ccw(c6281.78,3514.52) 6281.78,3568.45 6038.03,3568.45 6038.03,3832.15 cw(c6119.38,3832.15) 6119.38,3913.5 6182.2,3913.5 ccw(c6182.2,3973.29) 6241.98,3973.29 6241.98,4036.11 cw(c6258.87,4036.11) 6258.87,4053 6278,4053 cw(c6278,4036.08) 6294.92,4036.08 6294.92,3860.56 ccw(c6329.78,3860.56) 6329.78,3825.71 6335.71,3825.71 ccw(c6335.71,3861.37) 6371.37,3861.37 6371.37,4102.68 cw(c6443.14,4102.68) 6443.14,4174.45 6797.47,4174.45 ccw(c6797.47,4294.98) 6918,4294.98 6918,4817.31 ccw(c6877.31,4817.31) 6877.31,4858 6817.46,4858 ccw(c6817.45,4809.55) 6769,4809.54 6769,4417 cw(c6661.14,4416.99) 6661.13,4309.13 6462.56,4309.13 cw(c6462.56,4358.39) 6413.3,4358.39 6413.3,4438.67 cw(c6439.63,4438.67) 6439.63,4465 6444.22,4465 ccw(c6444.22,4485.78) 6465,4485.78 6465,4814.45 cw(c6546.55,4814.45) 6546.55,4896 6580.95,4896 ccw(c6580.95,4907.68) 6592.63,4907.68 6592.63,4916.37 ccw(c6585.01,4916.38) 6585,4924 6487,4924 ccw(c6486.99,4844.01) 6407,4844 6407,4719 cw(c6335.36,4718.99) 6335.35,4647.35 6124.35,4647.35 ccw(c6124.34,4583.53) 6060.52,4583.52 6060.52,4577.52 cw(c5995.47,4577.51) 5995.46,4512.46 5849.54,4512.46 cw(c5849.54,4550) 5812,4550 5812,4561 ccw(c5770,4561) 5770,4603 5493.67,4603 ccw(c5493.67,4522.33)
5V on VCC "NONET_L-01_P-001" (solid, remove dead copper, pour order 31): 5528,4865.24 5528,4799 cw(c5452,4799) 5452,4723 5412.48,4723 ccw(c5412.48,4580.52) 5270,4580.52 5270,3538 ccw(c5390,3538) 5390,3418 5450,3418 cw(c5450,3328) 5540,3328 5540,3283 ccw(c5678.52,3283) 5678.52,3144.48 6808.48,3144.48 ccw(c6808.48,3292) 6956,3292 6956,3543 ccw(c6901.37,3543) 6901.37,3597.63 6620.48,3597.63 cw(c6620.48,3645.87) 6572.23,3645.87 6572.23,3874.77 ccw(c6536.1,3874.77) 6536.1,3910.9 6476.9,3910.9 ccw(c6476.9,3876) 6442,3876 6442,3645.95 ccw(c6556.95,3645.95) 6556.95,3531 6850,3531 cw(c6850,3512.25) 6868.75,3512.25 6868.75,3378.75 cw(c6720.26,3378.74) 6720.25,3230.25 5818.43,3230.25 cw(c5818.43,3355.68) 5693,3355.68 5693,3649 ccw(c5661.88,3649) 5661.88,3680.12 5556.77,3680.12 ccw(c5556.77,3651.35) 5528,3651.35 5528,3539 cw(c5491,3539) 5491,3502 5430.43,3502 cw(c5430.43,3540.43) 5392,3540.43 5392,4534.75 cw(c5478.25,4534.75) 5478.25,4621 5789,4621 cw(c5789,4576.01) 5834,4576 5834,4565.75 ccw(c5871.74,4565.74) 5871.75,4528 5949,4528 ccw(c5949,4569.99) 5991,4570 5991,4591.16 cw(c6067.83,4591.16) 6067.84,4668 6321,4668 ccw(c6321,4726.65) 6379.65,4726.65 6379.65,4849.8 cw(c6460.87,4849.8) 6460.87,4931.01 6581.15,4931.01 cw(c6581.15,4909.16) 6603,4909.16 6603,4521 cw(c6522,4521) 6522,4440 6476,4440 ccw(c6476,4423.01) 6459.01,4423.01 6459.01,4345.99 ccw(c6480,4345.99) 6480,4325 6668,4325 ccw(c6668,4399) 6742,4399 6742,4885 ccw(c6646,4885) 6646,4981 5643.76,4981 ccw(c5643.76,4865.24)
GND on GND "NONET_L-01_P-001" (solid, remove dead copper, pour order 35): 5537.85,4815.85 5537.85,4746.85 cw(c5449.01,4746.84) 5449,4658 5380,4658 5380,3417 5423,3417 cw(c5423,3311) 5529,3311 5529,3272 ccw(c5631,3272) 5631,3170 6599,3170 ccw(c6599,3331) 6760,3331 6760,3578 cw(c6874.54,3578) 6874.54,3692.54 6957.54,3692.54 ccw(c6957.54,3749) 7014,3749 7014,3765.66 cw(c7062.34,3765.66) 7062.34,3814 7088,3814 ccw(c7088,3864) 7138,3864 7138,4845 ccw(c7027.1,4845) 7027.1,4955.9 5677.9,4955.9 ccw(c5677.9,4815.85)
Earth on GND "NONET_L-01_P-001" (solid, remove dead copper, pour order 43): 5252,4621 5252,3329 ccw(c5457,3329) 5457,3124 7844,3124 ccw(c7844,3327) 8047,3327 8047,4771 ccw(c7823,4771) 7823,4995 5590,4995 ccw(c5590,4725.26) 5320.26,4725.26 5320.26,3425.74 ccw(c5589,3425.74) 5589,3157 7685.99,3157 ccw(c7685.99,3481.39) 8010.38,3481.39 8010.38,4626.62 ccw(c7707.05,4626.62) 7707.05,4929.95 5560.95,4929.95 ccw(c5560.95,4621)
SNA on GND "NONET_L-01_P-001" (solid, remove dead copper, pour order 36): 7155,4793.98 7155,3846.15 cw(c7108.86,3846.14) 7108.85,3800 7067.68,3800 ccw(c7067.68,3753.32) 7021,3753.32 7021,3732.61 cw(c6971.56,3732.61) 6971.56,3683.17 6881.17,3683.17 ccw(c6881.17,3581.27) 6779.26,3581.26 6779.26,3324.74 ccw(c6938,3324.74) 6938,3166 7651,3166 ccw(c7651,3262) 7747,3262 7747,3297 cw(c7844,3297) 7844,3394 7858,3394 ccw(c7858,3550.85) 8014.85,3550.85 8014.85,4582.15 ccw(c7891,4582.15) 7891,4706 7855,4706 cw(c7855,4821) 7740,4821 7740,4858.82 ccw(c7654.27,4858.82) 7655.29,4944.54 7311.54,4948.66 ccw(c7309.69,4793.98)

## Silkscreen, mask and mechanical layers (free items; w line width, h text height)
Top Solder:
  rectangle: 7818,3424.3 8014.85,3818
  rectangle: 7818,4312.3 8014.85,4699
  rectangle: 7818,3868.3 8014.85,4262
Bottom Solder:
  rectangle: 7818,3424.3 8014.85,3818
  rectangle: 7818,3868.3 8014.85,4262
Mechanical 1:
  the board outline again, w10